# Altium PCB pcb_motor_drive_V2.0.PcbDoc
Units mil, origin at the board's own origin, x right, y up, seen from the top; angles counter-clockwise.
Board outline 2117 x 1491 mil, 4 copper layers (Top Layer, PWR02, GND03, Bottom Layer), stack 23.756 mil thick; 37 components, 32 nets, 172 pads, 179 vias.
Unrouted connection lines stored in the file: 49.
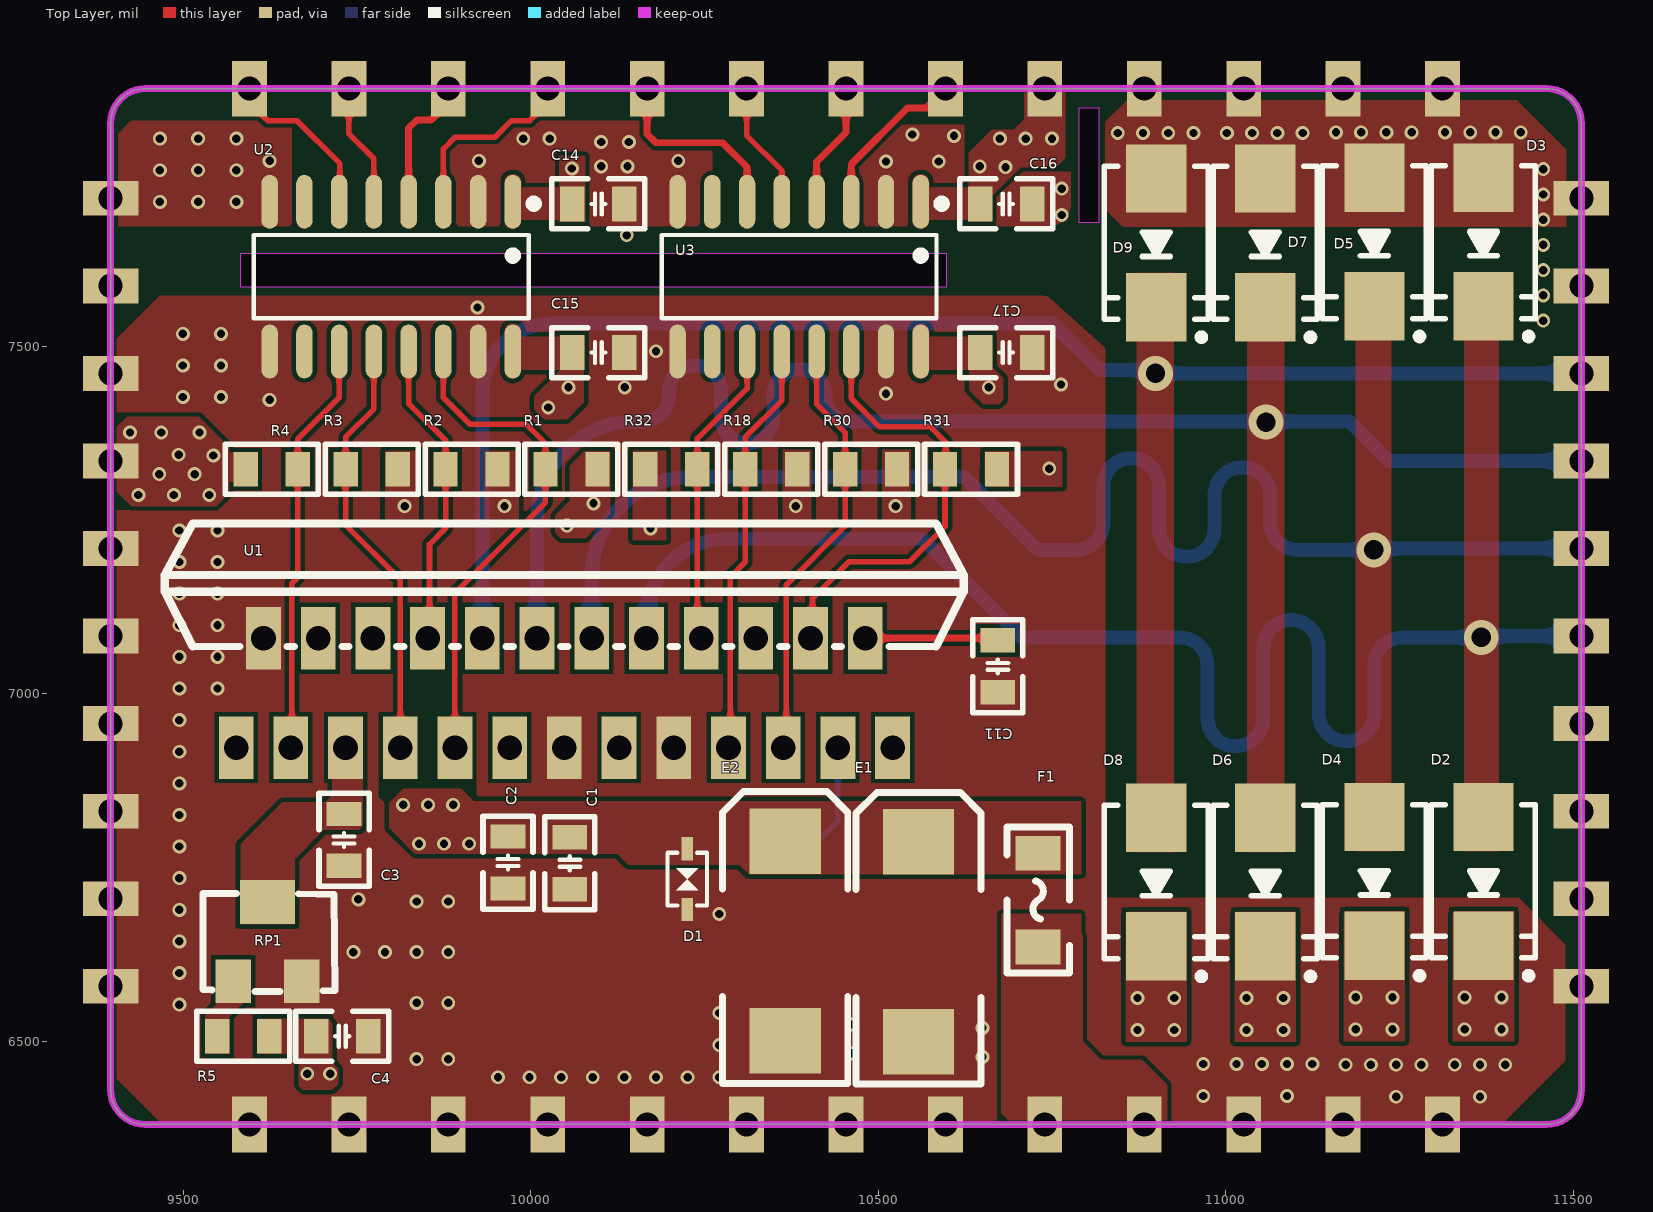
[diagram p0: Top Layer view]
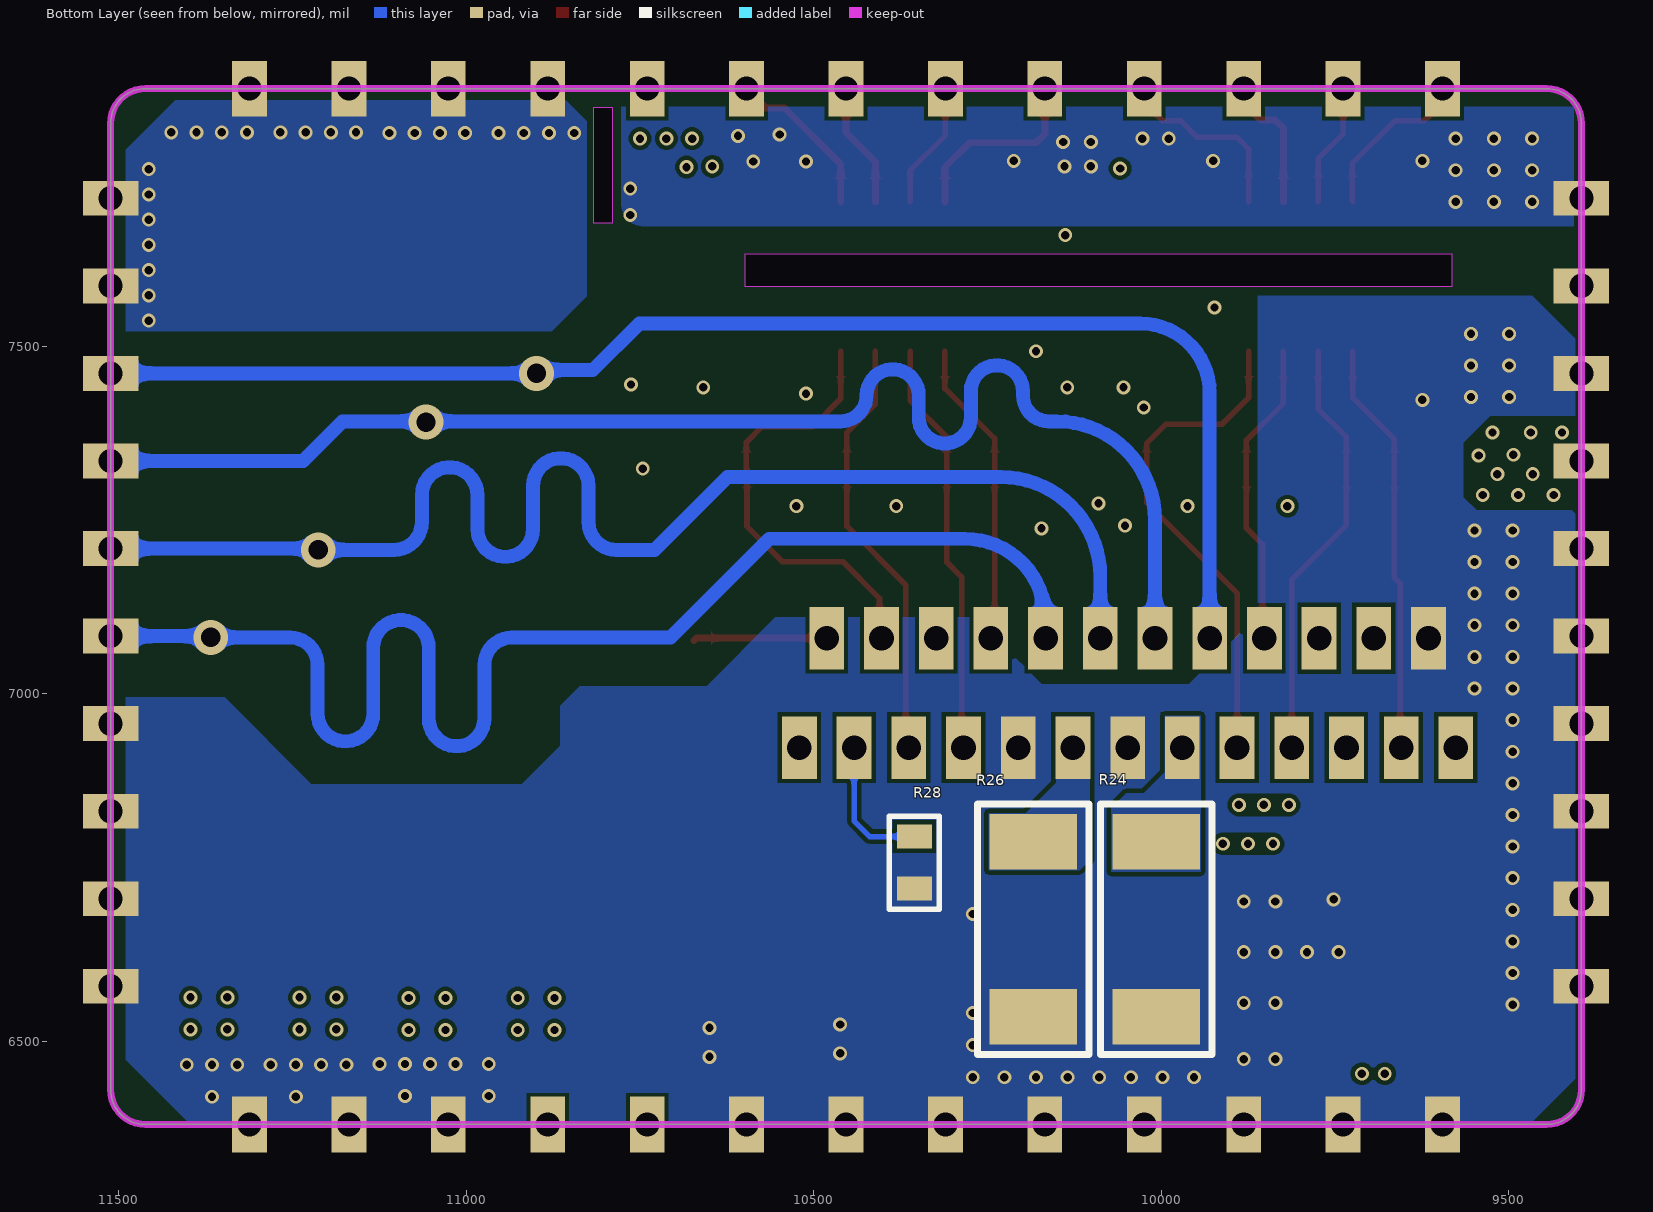
[diagram p1: Bottom Layer view, seen from below]
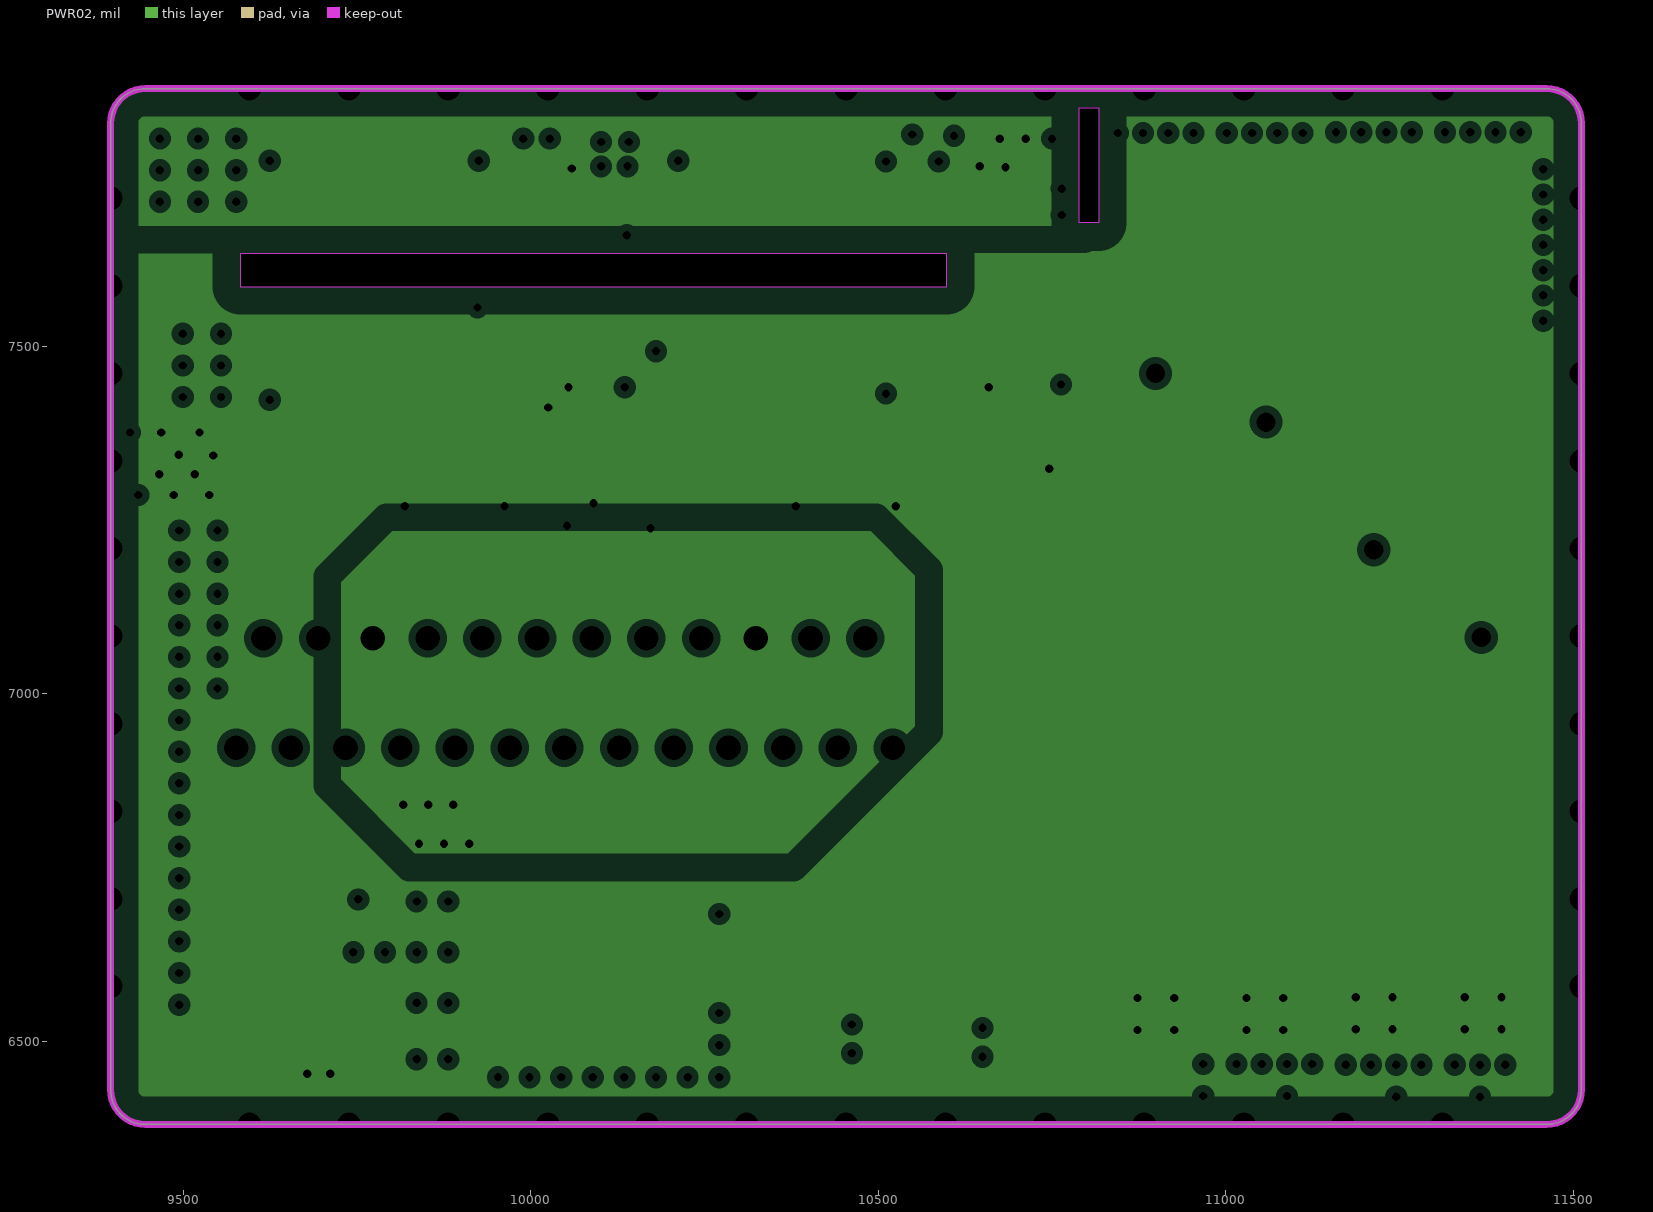
[diagram p2: PWR02, clearances drawn from the general rule]
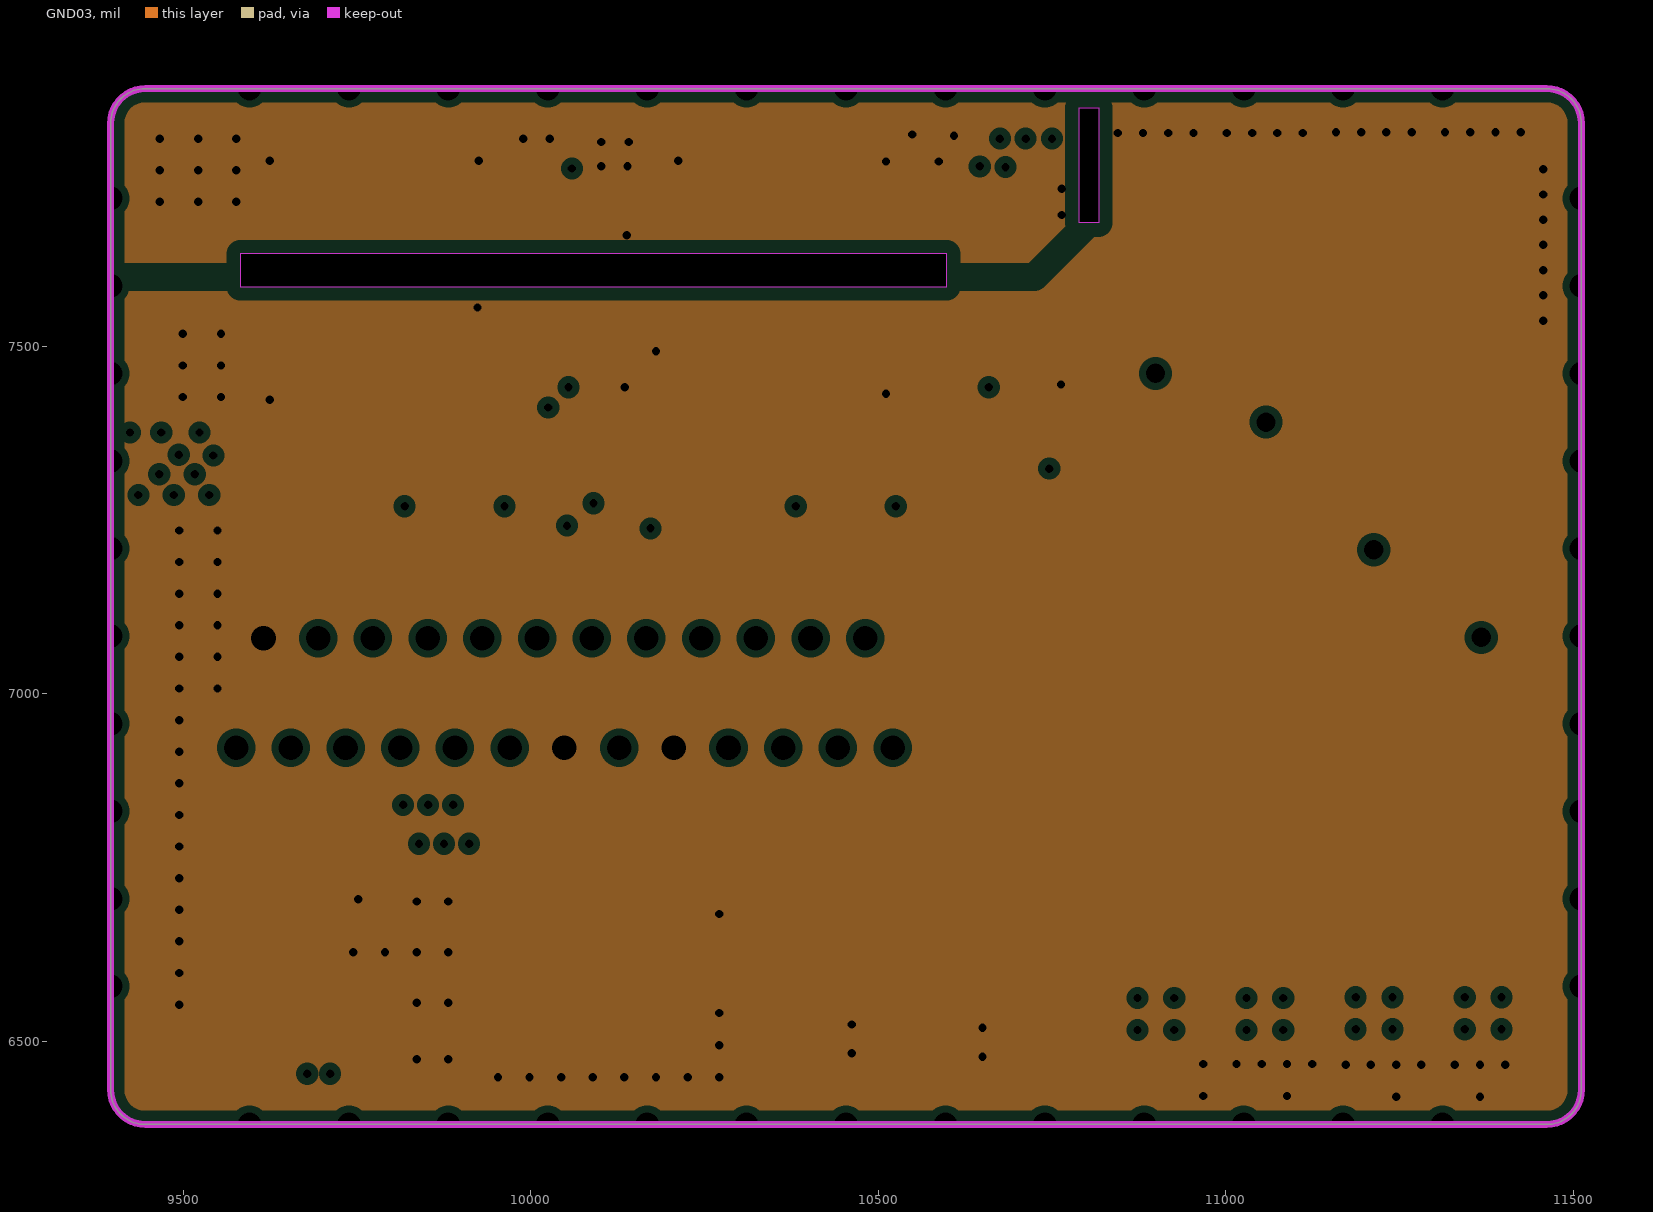
[diagram p3: GND03, clearances drawn from the general rule]
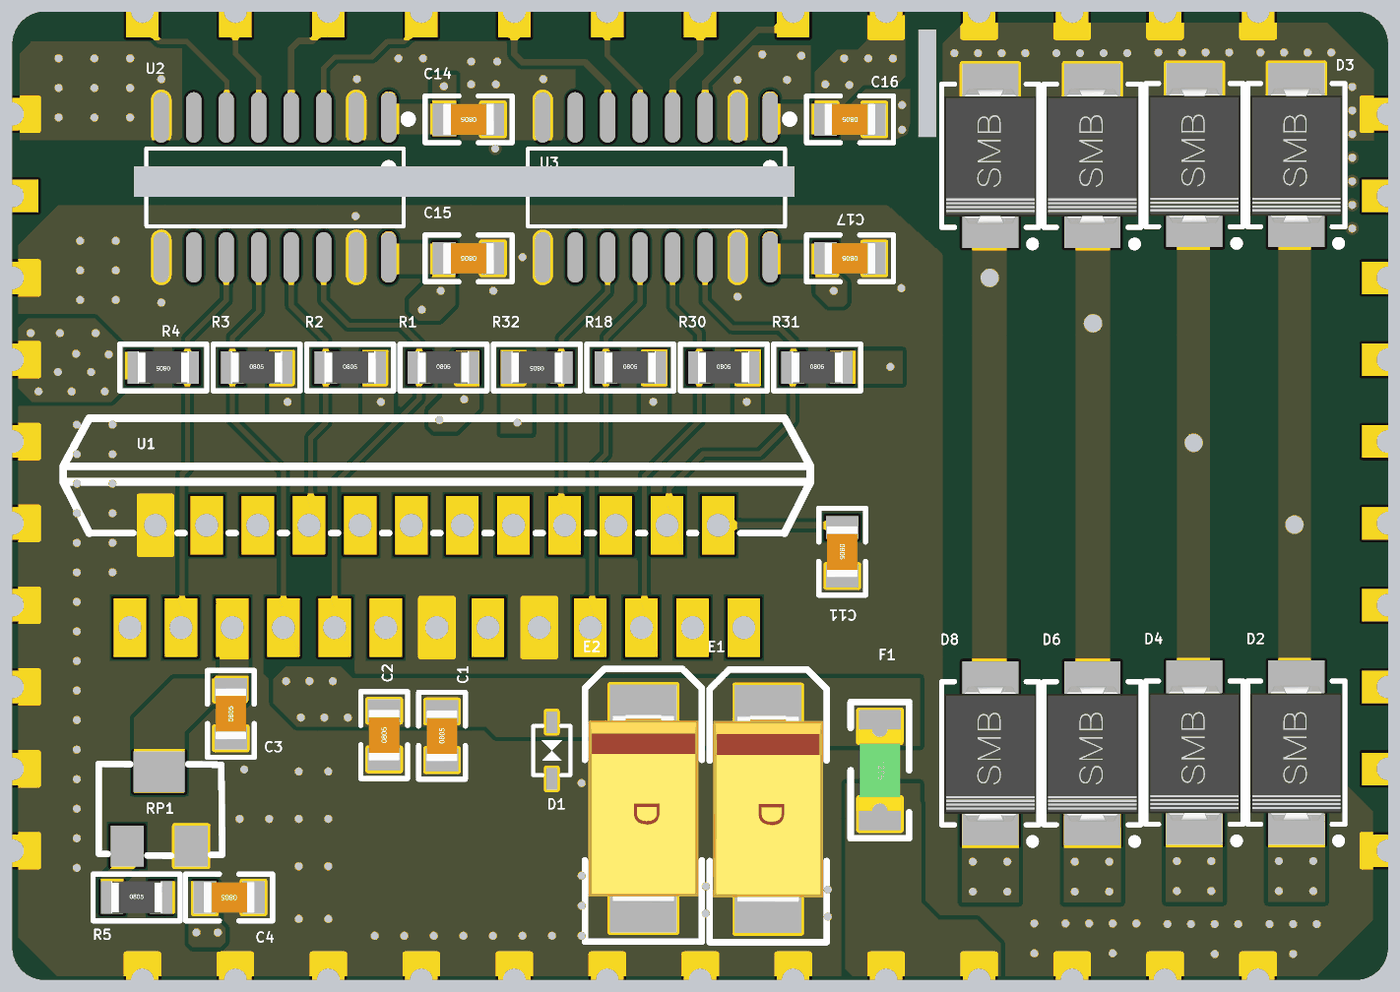
[diagram p4: 3D render of the assembled board from above, using the file's embedded part models]
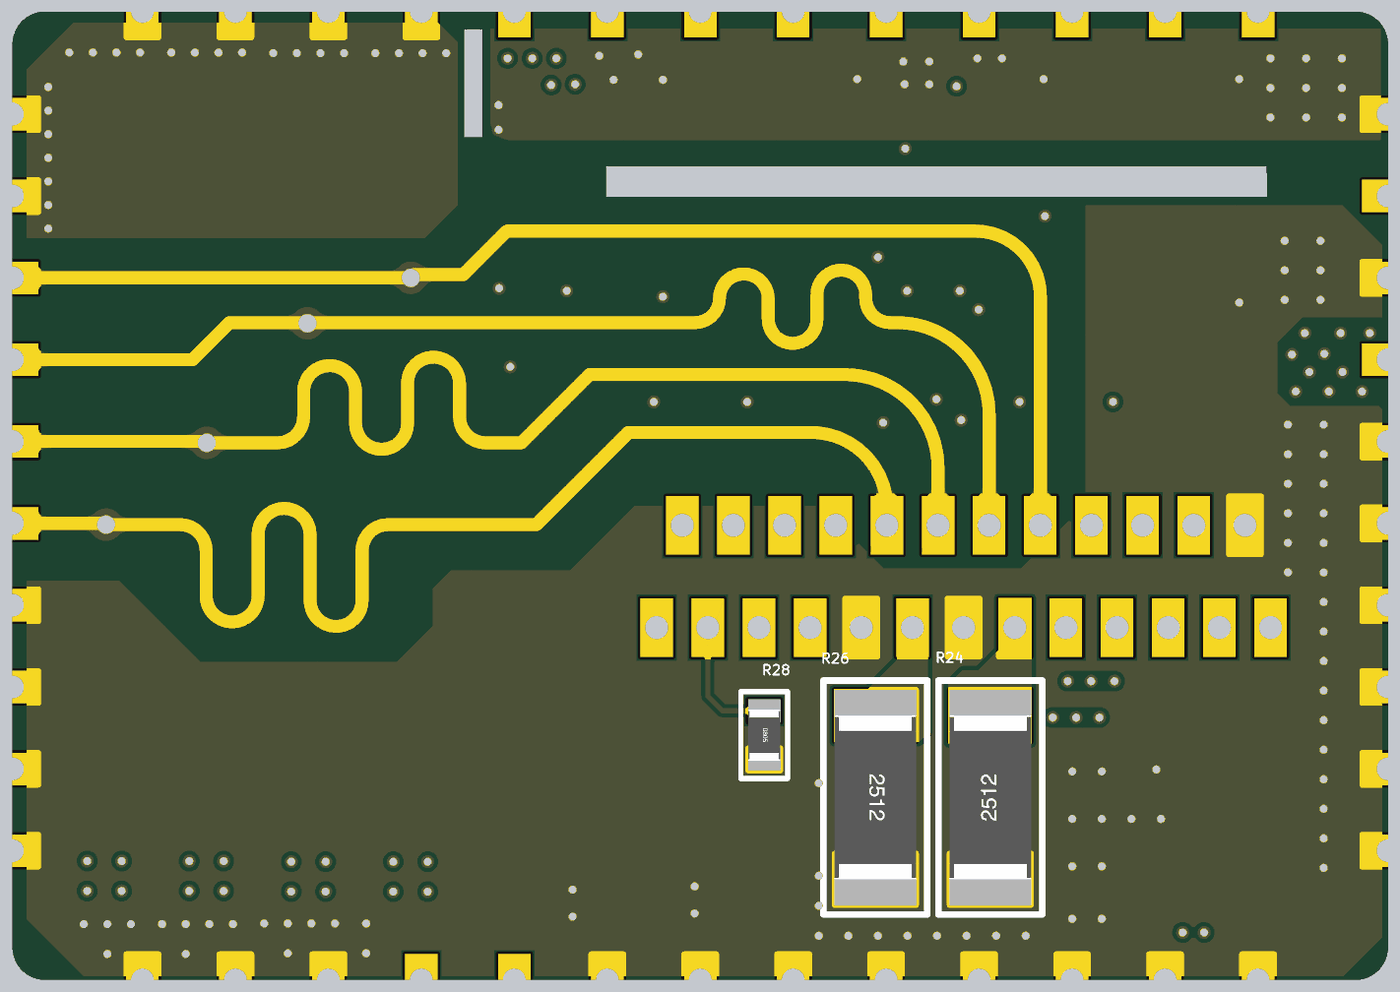
[diagram p5: 3D render of the assembled board from below, using the file's embedded part models]

## Layer stack, top to bottom
Top Solder: solder mask 0.4, Solder Resist, Dk 3.5
Top Layer: signal copper 1.4
Dielectric 3: prepreg 2.8, PP-006, Dk 4.1
PWR02: plane copper 1.378, net (Multiple Nets)
Dielectric 2: prepreg 2.8, PP-006, Dk 4.1
GND03: plane copper 1.378, net (Multiple Nets)
Dielectric 1: dielectric 12.6, FR-4, Dk 4.8
Bottom Layer: signal copper 1.4
Bottom Solder: solder mask 0.4, Solder Resist, Dk 3.5

## Board outline
9395,6430 ccw(c9445,6430) 9445,6380 11462,6380 ccw(c11462,6430) 11512,6430 11512,7821 ccw(c11462,7821) 11462,7871 9445,7871 ccw(c9445,7821) 9395,7821
cut-out: 10789,7843.55 10817,7843.55 10817,7677.55 10789,7677.55
cut-out: 9581.5,7633 9581.5,7586 10598.5,7586 10598.5,7633

## Design rules (kind name [scope] priority, off if disabled: settings)
Clearance Clearance_1 [OnLayer('Keep-Out Layer')] p1: gap=0 ignorepadtopadclearanceinfootprint=TRUE
Clearance [All] p2: gap=6 ignorepadtopadclearanceinfootprint=TRUE
PlaneClearance [All] p1: clearance=10
PlaneConnect [All] p1: planeconnectstyle=Direct reliefexpansion=20 reliefentries=4 reliefconductorwidth=10 reliefairgap=10
PolygonConnect [All] p1: connectstyle=Direct reliefconductorwidth=10 reliefentries=4 polygonreliefangle="90 Angle" airgapwidth=10
RoutingVias [All] p1: holewidth=20 width=12 viastyle="Through Hole" minholewidth=20 minwidth=12 maxholewidth=32 maxwidth=100
SilkToSilkClearance [All] p1: silktosilkclearance=3
SilkToSolderMaskClearance [IsPad] p1: minsilkscreentomaskgap=3 clearancetoexposedcopper=TRUE
SolderMaskExpansion [All] p1: expansion=4 istentingtop=FALSE
Width SIGNAL [All] p1: maxlimit=30 minlimit=6 preferedwidth=8
Width PWR [InNetClass('PWR')] p2: maxlimit=100 minlimit=8 preferedwidth=15
26 further rules are at their usual default settings.

## Components (designator, comment, footprint, x,y, rotation, side; value= is the part's Value field where it differs from the comment)
C1 "104" "C 0805_L" 10056,6756 r90 top
C2 "105" "C 0805_L" 9967,6757 r90 top
C3 "104" "C 0805_L" 9731,6789.6 r90 top
C4 "104" "C 0805_L" 9728.4,6507 r180 top
C11 "104" "C 0805_L" 10672,7039.4 r270 top
C14 "104" "C 0805_L" 10097,7705 r180 top
C15 "104" "C 0805_L" 10097,7491 r180 top
C16 "104" "C 0805_L" 10684,7705 r180 top
C17 "104" "C 0805_L" 10684,7491 r180 top
D1 "H5VLD3B" SOD-323 10225,6734 r90 top
D2 "SS510" SMB 11371,6730 r270 top
D3 "SS510" SMB 11371,7650 r270 top
D4 "SS510" SMB 11214,6730 r270 top
D5 "SS510" SMB 11214,7650 r270 top
D6 "SS510" SMB 11057,6729 r270 top
D7 "SS510" SMB 11057,7649 r270 top
D8 "SS510" SMB 10900,6729 r270 top
D9 "SS510" SMB 10900,7649 r270 top
E1 "47uF/35V" "CD D(7343)" 10558,6643 r270 top
E2 "47uF/35V" "CD D(7343)" 10366,6644 r270 top
F1 "SMD1206-200C-12V" "FU 1206" 10730,6703 r270 top
R1 "10K" "R 0805_L" 10058.32,7323 r0 top
R2 "10K" "R 0805_L" 9914.54,7323 r0 top
R3 "10K" "R 0805_L" 9770.77,7323 r0 top
R4 "10K" "R 0805_L" 9627,7323 r180 top
R5 "18K" "R 0805_L" 9586,6507 r0 top
R18 "10K" "R 0805_L" 10345.86,7323 r0 top
R24 "0.3R" "R 2512_M" 10007,6661 r90 bottom
R26 "0.3R" "R 2512_M" 10184,6661 r270 bottom
R28 "51K" "R 0805_L" 10355,6757 r270 bottom
R30 "10K" "R 0805_L" 10489.63,7323 r0 top
R31 "10K" "R 0805_L" 10633.4,7323 r0 top
R32 "10K" "R 0805_L" 10202.09,7323 r180 top
RP1 "10K" SMD-3P,4.8x3.5mm 9618.94,6644.5 r0 top
U1 "TB6600HG" TB6600HG 10030.04,7040 r0 top
U2 "Π140U" Π140U 9789.91,7596.8 r180 top
U3 "Π140U" Π140U 10377,7596.8 r180 top

## Footprints (in the part's own frame and the unit in brackets; to place one, negate y for a bottom-side part, rotate by r counter-clockwise, add the part's x,y. Pads: shape width x height; smd on the part's side, far side on the other; paste and mask are expansions set on the pad)
"C 0805_L" [mil] "无极性贴片电容                                        淘宝ID:黄晶宝石"
  rect 35x50 smd: 1(-37.4,0) 2(37.4,0)
  silkscreen extent -67,-36 67,36, body extent -39,-24 39,24, height 20
"CD D(7343)" [mm] "长7.3mm，宽4.3mm，厚2.8mm      淘宝ID:黄晶宝石"
  rect 2.4x2.6 smd: 1(-3.65,0) 2(3.65,0)
  silkscreen extent -5.46,-2.29 5.21,2.29, body extent -3.65,-2.15 3.65,2.15, height 2.8
"FU 1206" [mil] "贴片保险丝"
  rect 50x65 smd: 1(-67.5,0) 2(67.5,0)
  silkscreen extent -105,-45 105,45, body extent -63,-32 63,32, height 34
"R 0805_L" [mil] "1/8W贴片电阻"
  rect 35x50 smd: 1(-37.4,0) 2(37.4,0)
  silkscreen extent -67,-36 67,36, body extent -39,-25 39,25, height 20
"R 2512_M" [mm] "1W贴片电阻  淘宝ID:黄晶宝石"
  rect 2.032x3.2 smd: 1(-3.2,0) 2(3.2,0)
  silkscreen extent -4.57,-2.03 4.57,2.03, body extent -3.2,-1.6 3.2,1.6, height 0.55
SMB [mm] "4.7*3.9*2.2mm(长宽高，不包括引脚）"
  rect 2.5x2.2 smd: 1(-2.35,0) 2(2.35,0)
  silkscreen extent -2.8,-1.9 3.57,1.9, body extent -2.63,-1.8 2.67,1.8, height 2.35
SMD-3P,4.8x3.5mm [mm]
  rect 1.3x1.6 smd: 1(-1.203,-1.486) 3(1.297,-1.486)
  rect 2x1.6 smd: 2(0.047,1.414)
  silkscreen extent -2.31,-1.86 2.51,1.73
SOD-323 [mm]
  rect 0.845x0.42 smd: 1(-1.129,0) 2(1.091,0)
  silkscreen extent -0.98,-0.73 0.94,0.73
TB6600HG [mil]
  rect 50x90 hole 35.43: 1(-454.33,-117.48) 2(-414.96,40) 3(-375.59,-117.48) 4(-336.22,40) 5(-296.85,-117.48) 6(-257.48,40) 7(-218.11,-117.48) 8(-178.74,40) 9(-139.37,-117.48) 10(-100,40) 11(-60.63,-117.48) 12(-21.26,40) 13(18.11,-117.48) 14(57.48,40) 15(96.85,-117.48) 16(136.22,40) 17(175.59,-117.48) 18(214.96,40) 19(254.33,-117.48) 20(293.7,40) 21(333.07,-117.48) 22(372.44,40) 23(411.81,-117.48) 24(451.11,40) 25(490.55,-117.48)
  silkscreen extent -557,28 593,205
Π140U [mil]
  oval 23.7x77.6 smd: 1(-184.09,-111.2) 2(-134.09,-111.2) 3(-84.09,-111.2) 4(-34.09,-111.2) 5(15.91,-111.2) 6(65.91,-111.2) 7(115.91,-111.2) 8(165.91,-111.2) 9(165.91,104.2) 10(115.91,104.2) 11(65.91,104.2) 12(15.91,104.2) 13(-34.09,104.2) 14(-84.09,104.2) 15(-134.09,104.2) 16(-184.09,104.2)
  silkscreen extent -220,-114 189,56

## Part data
C1 C2 C3 C4 C11 C14 C15 C16 C17: library part C, "贴片电容", BOM名称=无极性贴片电容, 唯一出售店铺网址=https://shop463601444.taobao.com, 淘宝ID="封装库来自淘宝 ID：黄晶宝石", 联系售后，技术支持=https://shop463601444.taobao.com
D2 D3 D4 D5 D6 D7 D8 D9: "肖特基二极管", BOM名称=肖特基二极管, 封装库来自淘宝 ID：黄晶宝石="封装库来自淘宝 ID：黄晶宝石", 属性=100V/5A, 联系售后=https://shop463601444.taobao.com
E1 E2: library part CT, "贴片钽电容", BOM名称=贴片钽电容, 淘宝ID="封装库来自淘宝 ID：黄晶宝石", 联系售后=https://item.taobao.com/item.htm?id=566775463719
F1: library part FU, "贴片保险丝", BOM名称=贴片保险丝, 学习资源=https://shop463601444.taobao.com, 版权归属="封装库来自淘宝卖家 ID：黄晶宝石"
R1 R2 R3 R4 R5 R18 R24 R26 R28 R30 R31 R32: library part R, "贴片电阻", BOM名称=贴片电阻, 封装库来自淘宝卖家 ID：黄晶宝石=其他店铺购入均为盗版，不享受售后技术支持服务，请立即申请退款, 版权归属="来自淘宝 ID：黄晶宝石", 联系售后=https://item.taobao.com/item.htm?id=566775463719
RP1: library part RP-SMD, "贴片电位器", BOM名称=贴片电位器, 版权归属="封装库来自淘宝 ID：黄晶宝石", 联系售后=https://item.taobao.com/item.htm?id=566775463719
U2 U3: "数字隔离芯片"

## Free pads (board coordinates)
  rect 80x50 hole 35: 1(9395,7713) 2(9395,7587) 3(9395,7461) 4(9395,7335) 5(9395,7209) 6(9395,7083) 7(9395,6957) 8(9395,6831) 9(9395,6705) 10(9395,6579) 24(11512,6579) 25(11512,6705) 26(11512,6831) 27(11512,6957) 28(11512,7083) 29(11512,7209) 30(11512,7335) 31(11512,7461) 32(11512,7587) 33(11512,7713)
  rect 50x80 hole 35: 11(9595,6380) 12(9738.08,6380) 13(9881.17,6380) 14(10024.25,6380) 15(10167.33,6380) 16(10310.42,6380) 17(10453.5,6380) 18(10596.58,6380) 19(10739.67,6380) 20(10882.75,6380) 21(11025.83,6380) 22(11168.92,6380) 23(11312,6380) 34(11312,7871) 35(11168.92,7871) 36(11025.83,7871) 37(10882.75,7871) 38(10739.67,7871) 39(10596.58,7871) 40(10453.5,7871) 41(10310.42,7871) 42(10167.33,7871) 43(10024.25,7871) 44(9881.17,7871) 45(9738.08,7871) 46(9595,7871)

## Via types
v1: diameter 20, hole 12, Top Layer to Bottom Layer, tented both sides, 175 vias
v2: diameter 50, hole 28, Top Layer to Bottom Layer, tented both sides, 4 vias

## Nets (pads, with @x,y where several pads share a name; then routed paths per layer and width w, separated by ;. In a path a pad name is that pad's centre, name@x,y a point inside that pad or via, vN(x,y) a via of type N, cw(c..) or ccw(c..) an arc to the next point about the centre after c; other vN are vias at no path point)
A+: D2.1 D3.2 pad.28 U1.16 | length 2024.9
  Bottom Layer w20: U1.16 10166.55,7115 cw(c10282.52,7106.74) 10282.52,7223 10564,7223 10706,7081 10844,7081 10934,7081 cw(c10934,7041) 10974,7041 10974,6964.4 ccw(c11014,6964.4) 11054,6964.4 11054,7066.08 cw(c11094,7066.08) 11134,7066.08 11134,6971.41 ccw(c11174,6971.41) 11214,6971.41 11214,7041 cw(c11254,7041) 11254,7081 11356.78,7081 v2(11368,7081) 11368,7083 pad.28
A-: D4.1 D5.2 pad.29 U1.14 | length 2024.9
  Bottom Layer w20: U1.14 10087.52,7168.7 cw(c10230.82,7168.7) 10230.82,7312 10624,7312 10729,7207 10774,7207 10784,7207 ccw(c10784,7247) 10824,7247 10824,7298.94 cw(c10864,7298.94) 10904,7298.94 10904,7237 ccw(c10944,7237) 10984,7237 10984,7285.93 cw(c11024,7285.93) 11064,7285.93 11064,7247 ccw(c11104,7247) 11104,7207 v2(11213,7207) 11213,7209 pad.29
B+: D6.1 D7.2 pad.30 U1.12 | length 2024.9
  Bottom Layer w20: U1.12 10008.78,7250.76 cw(c10150.09,7250.76) 10150.09,7392.08 10151.32,7392.08 10161.32,7392.08 ccw(c10161.32,7429.58) 10198.82,7429.58 10198.82,7435.34 cw(c10236.32,7435.34) 10273.82,7435.34 10273.82,7397.67 ccw(c10311.32,7397.67) 10348.82,7397.67 10348.82,7429.58 cw(c10386.32,7429.58) 10423.82,7429.58 ccw(c10461.32,7429.58) 10461.32,7392.08 10757,7392.08 11177.92,7392.08 11235,7335 pad.30
  other v2: 11058,7391
B-: D8.1 D9.2 pad.31 U1.10 | length 2024.9
  Bottom Layer w20: U1.10 9930.04,7433 cw(c10030.04,7433) 10030.04,7533 10751,7533 10818,7466 10894,7466 v2(10899,7461) pad.31 pad.31@11515,7461
CLK: R30.1 U1.21 U3.13 | length 624
  Top Layer w8: U1.21 10367.48,6926.89 10367.48,7156.48 10452.23,7241.23 R30.1 10452.23,7375.77 10411.09,7416.91 U3.13
CLK_CTRL: pad.40 U3.4 | length 180.6
  Top Layer w10: U3.4 10411.09,7765.09 10453.5,7807.5 pad.40
CW: R31.1 U1.22 U3.14 | length 643.2
  Top Layer w8: U1.22 10405.31,7082.83 10405.31,7137.31 10458,7190 10545,7190 10596,7241 R31.1 10597,7324 10597,7362 10575,7384 10502,7384 10461.09,7424.91 U3.14
CW_CTRL: pad.39 U3.3 | length 236.5
  Top Layer w10: U3.3 10461.09,7762.09 10542,7843 10571.58,7843 10571.58,7846 pad.39
DGND: C14.1 C16.1 pad.1 U2.2 U2.8 U3.2 U3.8
  other v1: 10138,7660 10764,7689 9466,7708 9521,7708 9576,7708 10764,7727 9466,7753.5 9521,7753.5 9576,7753.5 10101,7759 10139,7759 10511,7766 10587,7766 9624,7767 9925,7767 10212,7767 10101,7794 10141,7794 9466,7799 9521,7799 9576,7799 9989,7799 10027,7799 10609,7803 10549,7805
EN: R32.1 U1.18 U3.11 | length 444.5
  Top Layer w8: U1.18 10239.49,7085.51 R32.1 10239.49,7367.49 10311.09,7439.09 U3.11
EN_CTRL: pad.42 U3.6 | length 278.8
  Top Layer w10: pad.42 10167.33,7805.67 10180,7793 10276,7793 10311.09,7757.91 U3.6
GND: C1.1 C2.1 C3.1 C4.1 C11.2 C15.1 C17.1 D1.1 D3.1 D5.1 D7.1 D9.1 E1.2 E2.2 pad.3 pad.5 pad.6 pad.7 pad.8 pad.9 pad.10 pad.11 pad.12 pad.13 pad.14 pad.15 pad.16 pad.17 pad.18 pad.21 pad.22 pad.23 pad.24 pad.25 pad.26 pad.27 pad.32 pad.33 pad.34 pad.35 pad.36 pad.37 R24.1 R26.2 R28.2 RP1.3 U1.2 U1.13 U1.17 U2.9 U2.15 U3.9 U3.15
  other v1: 11245.33,6420 11366,6420 10967.67,6421 11088.33,6421 9952.5,6448 9998,6448 10043.5,6448 10089,6448 10134.5,6448 10180,6448 10225.5,6448 10271,6448 11172.67,6466 11209,6466 11245.33,6466 11281.67,6466 11329.67,6466 11366,6466 11402.33,6466 10967.67,6467 11015.67,6467 11052,6467 11088.33,6467 11124.67,6467 9835.5,6474 9881,6474 10650,6477.41 10462,6482.41 10271,6494.25 10650,6519 10462,6524 10271,6540.5 9494,6552.5 9835.5,6555 9881,6555 9494,6598 9744.5,6628 9790,6628 9835.5,6628 9881,6628 9494,6643.5 10271,6683 9494,6689 9835.5,6701 9881,6701 9751.59,6704 9494,6734.5 9494,6780 9494,6825.5 9494,6871 9494,6916.5 9494,6962 9494,7007.5 9549,7007.5 9494,7053 9549,7053 9494,7098.5 9549,7098.5 9494,7144 9549,7144 9494,7189.5 9549,7189.5 9494,7235 9549,7235 9624,7423 9499,7427 9554,7427 10511,7432 10135,7441 10763,7445 9499,7472.5 9554,7472.5 10180,7493 9499,7518 9554,7518 11457,7537 9923,7556 11457,7573.33 11457,7609.67 11457,7646 11457,7682.33 11457,7718.67 11457,7755 10844.67,7807 10881,7807 10917.33,7807 10953.67,7807 11001.67,7807 11038,7807 11074.33,7807 11110.67,7807 11158.67,7808 11195,7808 11231.33,7808 11267.67,7808 11315.67,7808 11352,7808 11388.33,7808 11424.67,7808
M1: R3.1 U1.7 U2.12 | length 619.5
  Top Layer w8: U2.12 9774,7410 9733.37,7369.37 R3.1 9733.37,7242.63 9812,7164 9812,6922.59 U1.7
M1_CTRL: pad.45 U2.5 | length 177.9
  Top Layer w8: pad.45 9738.08,7805.92 9774,7770 U2.5
M2: R2.1 U1.8 U2.13 | length 445.3
  Top Layer w8: U2.13 9824,7418 9877.14,7364.86 R2.1 9877.14,7238.14 9854,7215 9854,7082.7 U1.8
M2_CTRL: pad.44 U2.4 | length 198.5
  Top Layer w10: U2.4 9824,7814 9836,7826 9856.17,7826 9881.17,7851 pad.44
M3: R1.1 U1.9 U2.14 | length 732.3
  Top Layer w8: U2.14 9874,7426 9912,7388 9993,7388 10020.91,7360.09 R1.1 10020.91,7275.16 9890.67,7144.92 U1.9
M3_CTRL: pad.43 U2.3 | length 274
  Top Layer w8: U2.3 9874,7784 9891,7801 9948,7801 9972,7825 9998.25,7825 10024.25,7851 pad.43
NetC11_1: C11.1 U1.24 | length 193
  Top Layer w10: U1.24 10668.8,7080 C11.1
  Bottom Layer w10: U1.24 U1.24@10481.75,7079.4
NetF1_2: F1.2 pad.19 pad.20
NetR5_1: R5.1 RP1.1
NetR24_2: R24.2 U1.11
NetR26_1: R26.1 U1.15
NetR28_1: R28.1 U1.23 | length 201.8
  Bottom Layer w8: R28.1 10419.4,6794.4 10441.85,6816.85 U1.23
RESET: R18.1 U1.19 U3.12 | length 601.9
  Top Layer w8: U1.19 10287,6925.15 10287,7168 10308.46,7189.46 R18.1 10308.46,7369.46 10361.09,7422.09 U3.12
RESET_CTRL: pad.41 U3.5 | length 184
  Top Layer w8: pad.41 10310.42,7803.58 10361.09,7752.91 U3.5
TQ: R4.1 U1.3 U2.11 | length 598.9
  Top Layer w8: U1.3 9656,6924.07 9656,7159 9664.4,7167.4 R4.1 9664.4,7366.4 9724,7426 U2.11
TQ_CTRL: pad.46 U2.6 | length 241.9
  Top Layer w8: pad.46 9595,7851 9621,7825 9663,7825 9725,7763 9725,7709 U2.6
VCC: C1.2 C2.2 D1.2 E1.1 E2.1 F1.1 U1.6 U1.20
  other v1: 9839,6784 9875,6784 9911,6784 9816,6840 9852,6840 9888,6840
VCC_5: C4.2 C15.2 C17.2 D2.2 D4.2 D6.2 D8.2 pad.4 R1.2 R2.2 R3.2 R4.2 R5.2 R18.2 R30.2 R31.2 R32.2 U2.16 U3.16
  other v1: 9678,6453 9711,6453 10873,6516 10926,6516 11030,6516 11083,6516 11187,6517 11240,6517 11344,6517 11397,6517 10873,6562 10926,6562 11030,6562 11083,6562 11187,6563 11240,6563 11344,6563 11397,6563 10172,7238 10052,7242 9818.23,7270 9962,7270 10381.23,7270 10525,7270 10090,7274 9435,7286 9486,7286 9537,7286 9465,7316 9516,7316 10746,7324 9543,7343 9493,7344 9423,7376 9468,7376 9523,7376 10025,7412 10054,7441 10659,7441
VCC_CTRL: C14.2 C16.2 pad.38 U2.1 U3.1
  other v1: 10059,7756 10683,7758 10646,7759 10675,7799 10712,7799 10750,7799
Vref: C3.2 RP1.2 U1.5
pads on no net: U1.1 U1.4 U1.25 U2.7 U2.10 U3.7 U3.10

## Polygon pours and split planes (outlines as drawn)
GND on Top Layer "GND_L01_P093" (solid, remove dead copper, pour order 93): 9404,7511 9404,6446 9470,6380 10827,6380 10827,7854 10827,7658 10742,7573 9466,7573
Vref on Top Layer "VREF_L01_P087" (solid, pour order 87): 9582,6668 9582,6784 9642,6844 9704,6844 9714,6854 9714,6951 9726,6963 9734,6963 9758,6939 9758,6809 9753,6804 9702,6804 9660,6762 9660,6668
VCC_5 on Top Layer "VCC_5_L01_P083" (solid, pour order 83): 9606,6532 9708,6532 9714,6526 9714,6469 9723,6460 9723,6438.82 9714.18,6430 9671.82,6430 9666,6435.82 9666,6472 9656,6482 9606,6482
NetR5_1 on Top Layer "NETR5_1_L01_P082" (solid, pour order 82): 9547,6614 9547,6553 9531,6537 9531,6482 9566,6482 9566,6535 9594,6563 9594,6614
GND on Top Layer "GND_L01_P081" (solid, pour order 81): 10797.98,6706 11422,6706 11489,6639 11489,6472 11404,6387 11404,6384 10919.18,6384 10800.49,6502.69
VCC_5 on Top Layer "VCC_5_L01_P078" (solid, pour order 78): 9404,7291 9404,7384 9419,7399 9522,7399 9566,7355 9566,7289 9547,7270 9425,7270
VCC_5 on Top Layer "VCC_5_L01_P074" (solid, pour order 74): 9606.5,7347 9606.5,7304.81 9507.5,7304.81 9507.5,7347
VCC_5 on Top Layer "VCC_5_L01_P073" (solid, pour order 73): 9789.98,7350 9838.48,7350 9838.48,7251 9789.98,7251
VCC_5 on Top Layer "VCC_5_L01_P072" (solid, pour order 72): 9933.75,7350 9982.25,7350 9982.25,7251 9933.75,7251
VCC_5 on Top Layer "VCC_5_L01_P071" (solid, pour order 71): 10077,7349 10056,7328 10056,7278 10035,7257 10035,7232 10043,7224 10079,7224 10114,7259 10114,7349
VCC_5 on Top Layer "VCC_5_L01_P070" (solid, pour order 70): 10146.5,7350 10195,7350 10195,7221 10146.5,7221
VCC_5 on Top Layer "VCC_5_L01_P069" (solid, pour order 69): 10362.23,7351 10403.23,7351 10403.23,7250 10362.23,7250
VCC_5 on Top Layer "VCC_5_L01_P068" (solid, pour order 68): 10506,7351 10547,7351 10547,7250 10506,7250
B- on Top Layer "B-_L01_P067" (solid, pour order 67): 10872,7606 10872,6772 10925,6772 10925,7606
VCC_5 on Top Layer "VCC_5_L01_P066" (solid, pour order 66): 10653.19,7349 10765,7349 10765,7298 10652.82,7298
GND on Top Layer "GND_L01_P065" (solid, remove dead copper, pour order 65): 10827,7823 10858,7854 11419,7854 11490,7783 11490,7672 10852,7672 10827,7697 10827,7822
VCC_5 on Top Layer "VCC_5_L01_P060" (solid, pour order 60): 10631,7514.16 10631,7437 10651,7417 10674,7417 10680,7423 10680,7454 10664.3,7469.7 10664.3,7513.85
VCC_5 on Top Layer "VCC_5_L01_P059" (solid, pour order 59): 10041,7516 10041,7464 10005,7428 10005,7409 10019,7395 10052,7395 10076.27,7419.27 10076.27,7516.04
DGND on Top Layer "DGND_L01_P058" (solid, remove dead copper, pour order 58): 9406,7845 9406,7673 10745,7673 ccw(c10745,7705) 10777,7705 10777,7845
VCC_CTRL on Top Layer "VCC_CTRL_L01_P033" (solid, pour order 33): 10041,7679 10078.02,7679 10078.02,7774 10041,7774
VCC_CTRL on Top Layer "VCC_CTRL_L01_P056" (solid, pour order 56): 10710,7865.25 10710,7827 10695,7812 10663,7812 10630,7779 10630,7680 10662.09,7680 10664.09,7682 10664.09,7717.09 10705,7758 10756,7758 10769,7771 10769,7866.14
NetF1_2 on Top Layer "NETF1_2_L01_P050" (solid, pour order 50): 10677,6683 10677,6396 10687,6386 10916,6386 10916,6437.07 10880.07,6473 10821,6473 10794,6500 10794,6683
VCC on Top Layer "VCC_L01_P049" (solid, pour order 49): 9816,6863 9796,6843 9796,6807 9833,6770 10124,6770 10140,6754 10300,6754 10314,6740 10792,6740 10792,6845 9918,6845 9900,6863
VCC_5 on Top Layer "VCC_5_L01_P047" (solid, pour order 47): 10856.09,6686.33 10856.09,6499 10944,6499 10944,6686
VCC_5 on Top Layer "VCC_5_L01_P046" (solid, pour order 46): 11013.09,6686.33 11013.09,6499 11101,6499 11101,6686
VCC_5 on Top Layer "VCC_5_L01_P045" (solid, pour order 45): 11170.09,6687.33 11170.09,6500 11258,6500 11258,6687
A+ on Top Layer "A+_L01_P044" (solid, pour order 44): 11343,7607 11343,6773 11393,6773 11393,7607
A- on Top Layer "A-_L01_P043" (solid, pour order 43): 11187,7607 11187,6773 11238,6773 11238,7607
B+ on Top Layer "B+_L01_P042" (solid, pour order 42): 11031,7606 11031,6772 11084,6772 11084,7606
VCC_5 on Top Layer "VCC_5_L01_P016" (solid, pour order 16): 11327.09,6687.33 11327.09,6500 11415,6500 11415,6687
VCC_CTRL on Top Layer "VCC_CTRL_L01_P012" (solid, pour order 12): 10549.09,7681 ccw(c10561.09,7681) 10561.09,7669 ccw(c10561.09,7680) 10572.09,7680 10574.09,7682 10664.09,7682 10664.09,7729 10573.09,7729 10573.09,7737 ccw(c10562.09,7737) 10562.09,7748 10560.09,7748 ccw(c10560.09,7737) 10549.09,7737 10549.09,7725
VCC_5 on Top Layer "VCC_5_L01_P011" (solid, pour order 11): 10549.09,7465.6 ccw(c10561.09,7465.6) 10561.09,7453.6 ccw(c10561.09,7464.6) 10572.09,7464.6 10574.09,7466.6 10664.09,7466.6 10664.09,7513.6 10573.09,7513.6 10573.09,7521.6 ccw(c10562.09,7521.6) 10562.09,7532.6 10560.09,7532.6 ccw(c10560.09,7521.6) 10549.09,7521.6 10549.09,7509.6
VCC_5 on Top Layer "VCC_5_L01_P010" (solid, pour order 10): 9962,7465.6 ccw(c9974,7465.6) 9974,7453.6 ccw(c9974,7464.6) 9985,7464.6 9987,7466.6 10077,7466.6 10077,7513.6 9986,7513.6 9986,7521.6 ccw(c9975,7521.6) 9975,7532.6 9973,7532.6 ccw(c9973,7521.6) 9962,7521.6 9962,7509.6
VCC_CTRL on Top Layer "VCC_CTRL_L01_P009" (solid, pour order 9): 9962,7681 ccw(c9974,7681) 9974,7669 ccw(c9974,7680) 9985,7680 9987,7682 10077,7682 10077,7729 9986,7729 9986,7737 ccw(c9975,7737) 9975,7748 9973,7748 ccw(c9973,7737) 9962,7737 9962,7725
GND on Bottom Layer "GND_L04_P092" (solid, remove dead copper, pour order 92): 9404,7511 9404,6446 9470,6380 11397,6380 11490,6473 11490,7783 11419,7854 10857,7854 10827,7824 10827,7658 10742,7573 9466,7573
NetR26_1 on Bottom Layer "NETR26_1_L04_P091" (solid, pour order 91): 10103,6967 10103,6760 10117,6746 10248,6746 10248,6828 10195,6828 10151,6872 10151,6967
NetR24_2 on Bottom Layer "NETR24_2_L04_P090" (solid, pour order 90): 9943,6968 9943,6744 10072,6744 10072,6835 10050,6857 10025,6857 9995,6887 9995,6968
DGND on Bottom Layer "DGND_L04_P057" (solid, remove dead copper, pour order 57): 9406,7845 9406,7673 10745,7673 ccw(c10745,7705) 10777,7705 10777,7845
GND on GND03 (split plane): 11470.72,7849.75 11476.16,7847.5 11481.06,7844.23 11485.23,7840.06 11488.5,7835.16 11490.75,7829.72 11491.9,7823.95 11491.9,7821 11491.9,6430 11491.9,6427.05 11490.75,6421.28 11488.5,6415.84 11485.23,6410.94 11481.06,6406.77 11476.16,6403.5 11470.72,6401.25 11464.95,6400.1 9442.05,6400.1 9436.28,6401.25 9430.84,6403.5 9425.94,6406.77 9421.77,6410.94 9418.5,6415.84 9416.25,6421.28 9415.1,6427.05 9415.1,6430 9415.1,7579.9 9562.45,7579.9 9562.93,7578.31 9564.79,7574.83 9567.29,7571.79 9570.33,7569.29 9573.81,7567.43 9577.58,7566.29 9581.5,7565.9 10598.5,7565.9 10602.42,7566.29 10606.19,7567.43 10609.67,7569.29 10612.71,7571.79 10615.21,7574.83 10617.07,7578.31 10617.55,7579.9 10724.95,7579.9 10728.87,7580.29 10732.64,7581.43 10736.11,7583.29 10739.16,7585.79 10810.82,7657.46 10817,7657.46 10820.92,7657.84 10824.69,7658.98 10828.17,7660.84 10831.21,7663.34 10833.71,7666.39 10835.57,7669.86 10836.71,7673.63 10837.1,7677.55 10837.1,7843.55 10836.71,7847.47 10835.67,7850.9 11464.95,7850.9
DGND on GND03 (split plane): 10769.29,7847.47 10768.9,7843.55 10768.9,7677.55 10769.29,7673.63 10769.49,7672.96 10716.62,7620.1 10618.6,7620.1 10618.6,7633 10618.21,7636.92 10617.07,7640.69 10615.21,7644.17 10612.71,7647.21 10609.67,7649.71 10606.19,7651.57 10602.42,7652.71 10598.5,7653.1 9581.5,7653.1 9577.58,7652.71 9573.81,7651.57 9570.33,7649.71 9567.29,7647.21 9564.79,7644.17 9562.93,7640.69 9561.79,7636.92 9561.4,7633 9561.4,7620.1 9415.1,7620.1 9415.1,7821 9415.1,7823.95 9416.25,7829.72 9418.5,7835.16 9421.77,7840.06 9425.94,7844.23 9430.84,7847.5 9436.28,7849.75 9442.05,7850.9 10770.33,7850.9
VCC_CTRL on PWR02 (split plane): 10748.91,7677.55 10749.14,7674.09 9435.09,7673.13 9435.09,7821 9435.09,7821.98 9435.47,7823.89 9436.21,7825.7 9437.3,7827.32 9438.68,7828.7 9440.3,7829.79 9442.11,7830.53 9444.02,7830.91 10748.91,7830.91
VCC_5 on PWR02 (split plane): 11464.89,7830.53 11466.7,7829.79 11468.32,7828.7 11469.7,7827.32 11470.79,7825.7 11471.53,7823.89 11471.91,7821.98 11471.91,7821 11471.91,6430 11471.91,6429.02 11471.53,6427.11 11470.79,6425.3 11469.7,6423.68 11468.32,6422.3 11466.7,6421.21 11464.89,6420.47 11462.98,6420.09 9444.02,6420.09 9442.11,6420.47 9440.3,6421.21 9438.68,6422.3 9437.3,6423.68 9436.21,6425.3 9435.47,6427.11 9435.09,6429.02 9435.09,6430 9435.09,7632.93 9541.41,7633.01 9541.41,7633 9541.41,7586 9541.76,7580.77 9542.78,7575.62 9544.47,7570.66 9546.78,7565.96 9549.7,7561.6 9553.16,7557.66 9557.1,7554.2 9561.46,7551.28 9566.16,7548.97 9571.12,7547.28 9576.27,7546.26 9581.5,7545.91 10598.5,7545.91 10603.73,7546.26 10608.88,7547.28 10613.84,7548.97 10618.54,7551.28 10622.9,7554.2 10626.84,7557.66 10630.3,7561.6 10633.22,7565.96 10635.53,7570.66 10637.22,7575.62 10638.24,7580.77 10638.59,7586 10638.59,7633 10638.53,7633.81 10796.74,7633.93 10798.68,7634.12 10800.64,7634.31 10800.65,7634.32 10800.66,7634.32 10802.54,7634.89 10804.41,7635.46 10804.42,7635.46 10804.43,7635.46 10806.16,7636.39 10807.89,7637.32 10807.9,7637.32 10808.07,7637.47 10817,7637.47 10822.23,7637.81 10827.38,7638.83 10832.34,7640.52 10837.04,7642.84 10841.4,7645.75 10845.34,7649.21 10848.8,7653.15 10851.72,7657.51 10854.03,7662.21 10855.72,7667.18 10856.74,7672.32 10857.09,7677.55 10857.09,7830.91 11462.98,7830.91
VCC on PWR02 (split plane): 10552.9,7169.68 10552.9,6953.32 10369.68,6770.1 9833.32,6770.1 9727.1,6876.32 9727.1,7044 9727.1,7160.68 9800.32,7233.9 10488.68,7233.9

## Keep-outs
Keep-Out Layer:
  lines w10: 9395,6430 ccw(c9445,6430) 9445,6380 11462,6380 ccw(c11462,6430) 11512,6430 11512,7821 ccw(c11462,7821) 11462,7871 11399,7871 9475,7871 9445,7871 ccw(c9445,7821) 9395,7821 9395,6430

## Other copper
Top Layer:
  pour cut-out: 9406,7806 9406,7825 9424,7825
  pour cut-out: 9564,7825 9406,7825 9406,7845
  pour cut-out: 10055.25,7825 10155,7825 10155,7837
  pour cut-out: 10623.51,7822.77 10623.51,7819 10534,7819
  pour cut-out: 9419,7405.49 9404,7405.49 9404,7399.72
  pour cut-out: 9437,7264 9404,7264 9404,7275.28
  pour cut-out: 10623.51,7779 10623.51,7825 10627.58,7825
  pour cut-out: 10433.48,7131 10433.48,7153.48 10418.42,7138.42 10418.42,7136
  pour cut-out: 9780.93,6871.52 9780.93,6851.58 9789.51,6843
  pour cut-out: 9921.67,6871.52 9920.69,6870.54 9920.69,6851.49
  pour cut-out: 10261.09,7753.15 10261.09,7781.78 10271.35,7781.78
  pour cut-out: 9784.2,7749.6 9812.78,7749.6 9812.78,7734.95 9805.8,7734.95
  pour cut-out: 9655.8,7734.95 9655.8,7814.8 9658.78,7814.8
  pour cut-out: 9831.71,7836.36 9831.71,7845 9850.17,7845
  pour cut-out: 10756,7751.51 10777,7751.51 10777,7762.74
  pour cut-out: 10743,7572 10825,7572 10825,7499
  pour cut-out: 10670.51,6396 10670.51,6386 10687,6386
Bottom Layer:
  pour cut-out: 9404,7400 9526,7400 9565,7361 9565,7283 9546,7264 9404,7264
  pour cut-out: 9556.18,7343 9514.82,7343 9514.82,7311 9556.18,7311 9556.18,7314.15
  pour cut-out: 9812.82,6856 9891.18,6856 9904,6843.18 9891.18,6830.37 9891.18,6824 9812.82,6824
  pour cut-out: 9835.82,6800 9914.18,6800 9927,6787.18 9914.18,6774.37 9914.18,6768 9835.82,6768
  pour cut-out: 9861,7505 9861,7573 9919,7573 9924,7568
  pour cut-out: 10827,7572.42 10827,7658 10741.42,7572.42
  pour cut-out: 9861,7505 9928,7572 10827,7572 10877,7522 11494,7522 11511,7505 11511,7016 11490,6995 11348,6995 11223,6870 10920,6870 10865,6925 10865,6983 10837,7011 10654,7011 10555,7110 10268,7110 10172,7014 9960,7014 9861,7113
PWR02 (plane layer: these items are gaps in the copper):
  lines w40: 9395,7653 10796.72,7654.03 10796.72,7861.41 10789,7869.14 10789,7886 ; 9707,6868 9707,7044 9707,7169 9792,7254 10497,7254 10573,7178 10573,6945 10378,6750 10035,6750 9825,6750 9707,6868
GND03 (plane layer: these items are gaps in the copper):
  lines w40: 9395,7600 9580,7600 ; 10597,7600 10724.95,7600 10802.5,7677.55

## Silkscreen, mask and mechanical layers (free items; w line width, h text height)
Bottom Solder:
  lines w20: 9930.04,7080 9930.04,7432.96 cw(c10030.08,7432.96) 10030.08,7533 10751.16,7533 ; 10008.78,7080 10008.78,7250.47 cw(c10009.53,7250.47) 10009,7251 cw(c10150,7251) 10150,7392 10151,7392 10161,7392 ccw(c10161,7430) 10199,7430 10199,7435 cw(c10237,7435) 10237,7473 cw(c10237,7436) 10274,7436 10274,7398 10274,7397 ccw(c10311,7397) 10311,7360 ccw(c10311,7398) 10349,7398 10349,7429 cw(c10387,7429) 10387,7467 cw(c10387,7430) 10424,7430 ccw(c10462,7430) 10462,7392 11178,7392 11235,7335 11512,7335 ; 10087.52,7080 10087.52,7168.18 cw(c10231.61,7168.18) 10231.61,7312.27 10623.73,7312.27 10729,7207 10784,7207 ccw(c10784,7247) 10824,7247 10824,7298 cw(c10865,7298) 10865,7339 cw(c10865,7300) 10904,7300 10904,7237 ccw(c10944,7237) 10944,7197 ccw(c10944,7237) 10984,7237 10984,7286 cw(c11024,7286) 11024,7326 cw(c11024,7286) 11064,7286 11064,7247 ccw(c11104,7247) 11104,7207 11213,7207 cw(c11215,7207) 11215,7209 11512,7209 ; 10166.26,7080 cw(c10166.26,7080.26) 10166,7080.26 10166,7105.34 cw(c10283.66,7105.34) 10283.66,7223 10564,7223 10706,7081 10844,7081 10934,7081 cw(c10934,7041) 10974,7041 10974,6964 ccw(c11014,6964) 11014,6924 ccw(c11014,6964) 11054,6964 11054,7066 cw(c11094,7066) 11094,7106 cw(c11094,7066) 11134,7066 11134,6971 ccw(c11174,6971) 11174,6931 ccw(c11174,6971) 11214,6971 11214,7041 cw(c11254,7041) 11254,7081 11357,7081 11363.08,7081 ccw(c11363.08,7087.85) 11367.92,7083.01 11511.98,7083.01 ; 11512,7461 10899,7461 10893.9,7466.1 10818.07,7466.1 10751.17,7532.99 ; 10751.17,7532.99 ccw(c10751.16,7532.99) 10751.16,7533 ; 11512,7083 ccw(c11511.98,7082.98) 11511.98,7083.01